# Altium PCB main_board.PcbDoc (part 3 of 3)
Units mm, origin at the board's own origin, x right, y up, seen from the top; angles counter-clockwise.
Board outline 156 x 135 mm, 4 copper layers (Top Side, Ground Plane, Power Plane, Bottom Side), stack 1.602 mm thick; 329 components, 291 nets, 1334 pads, 943 vias.
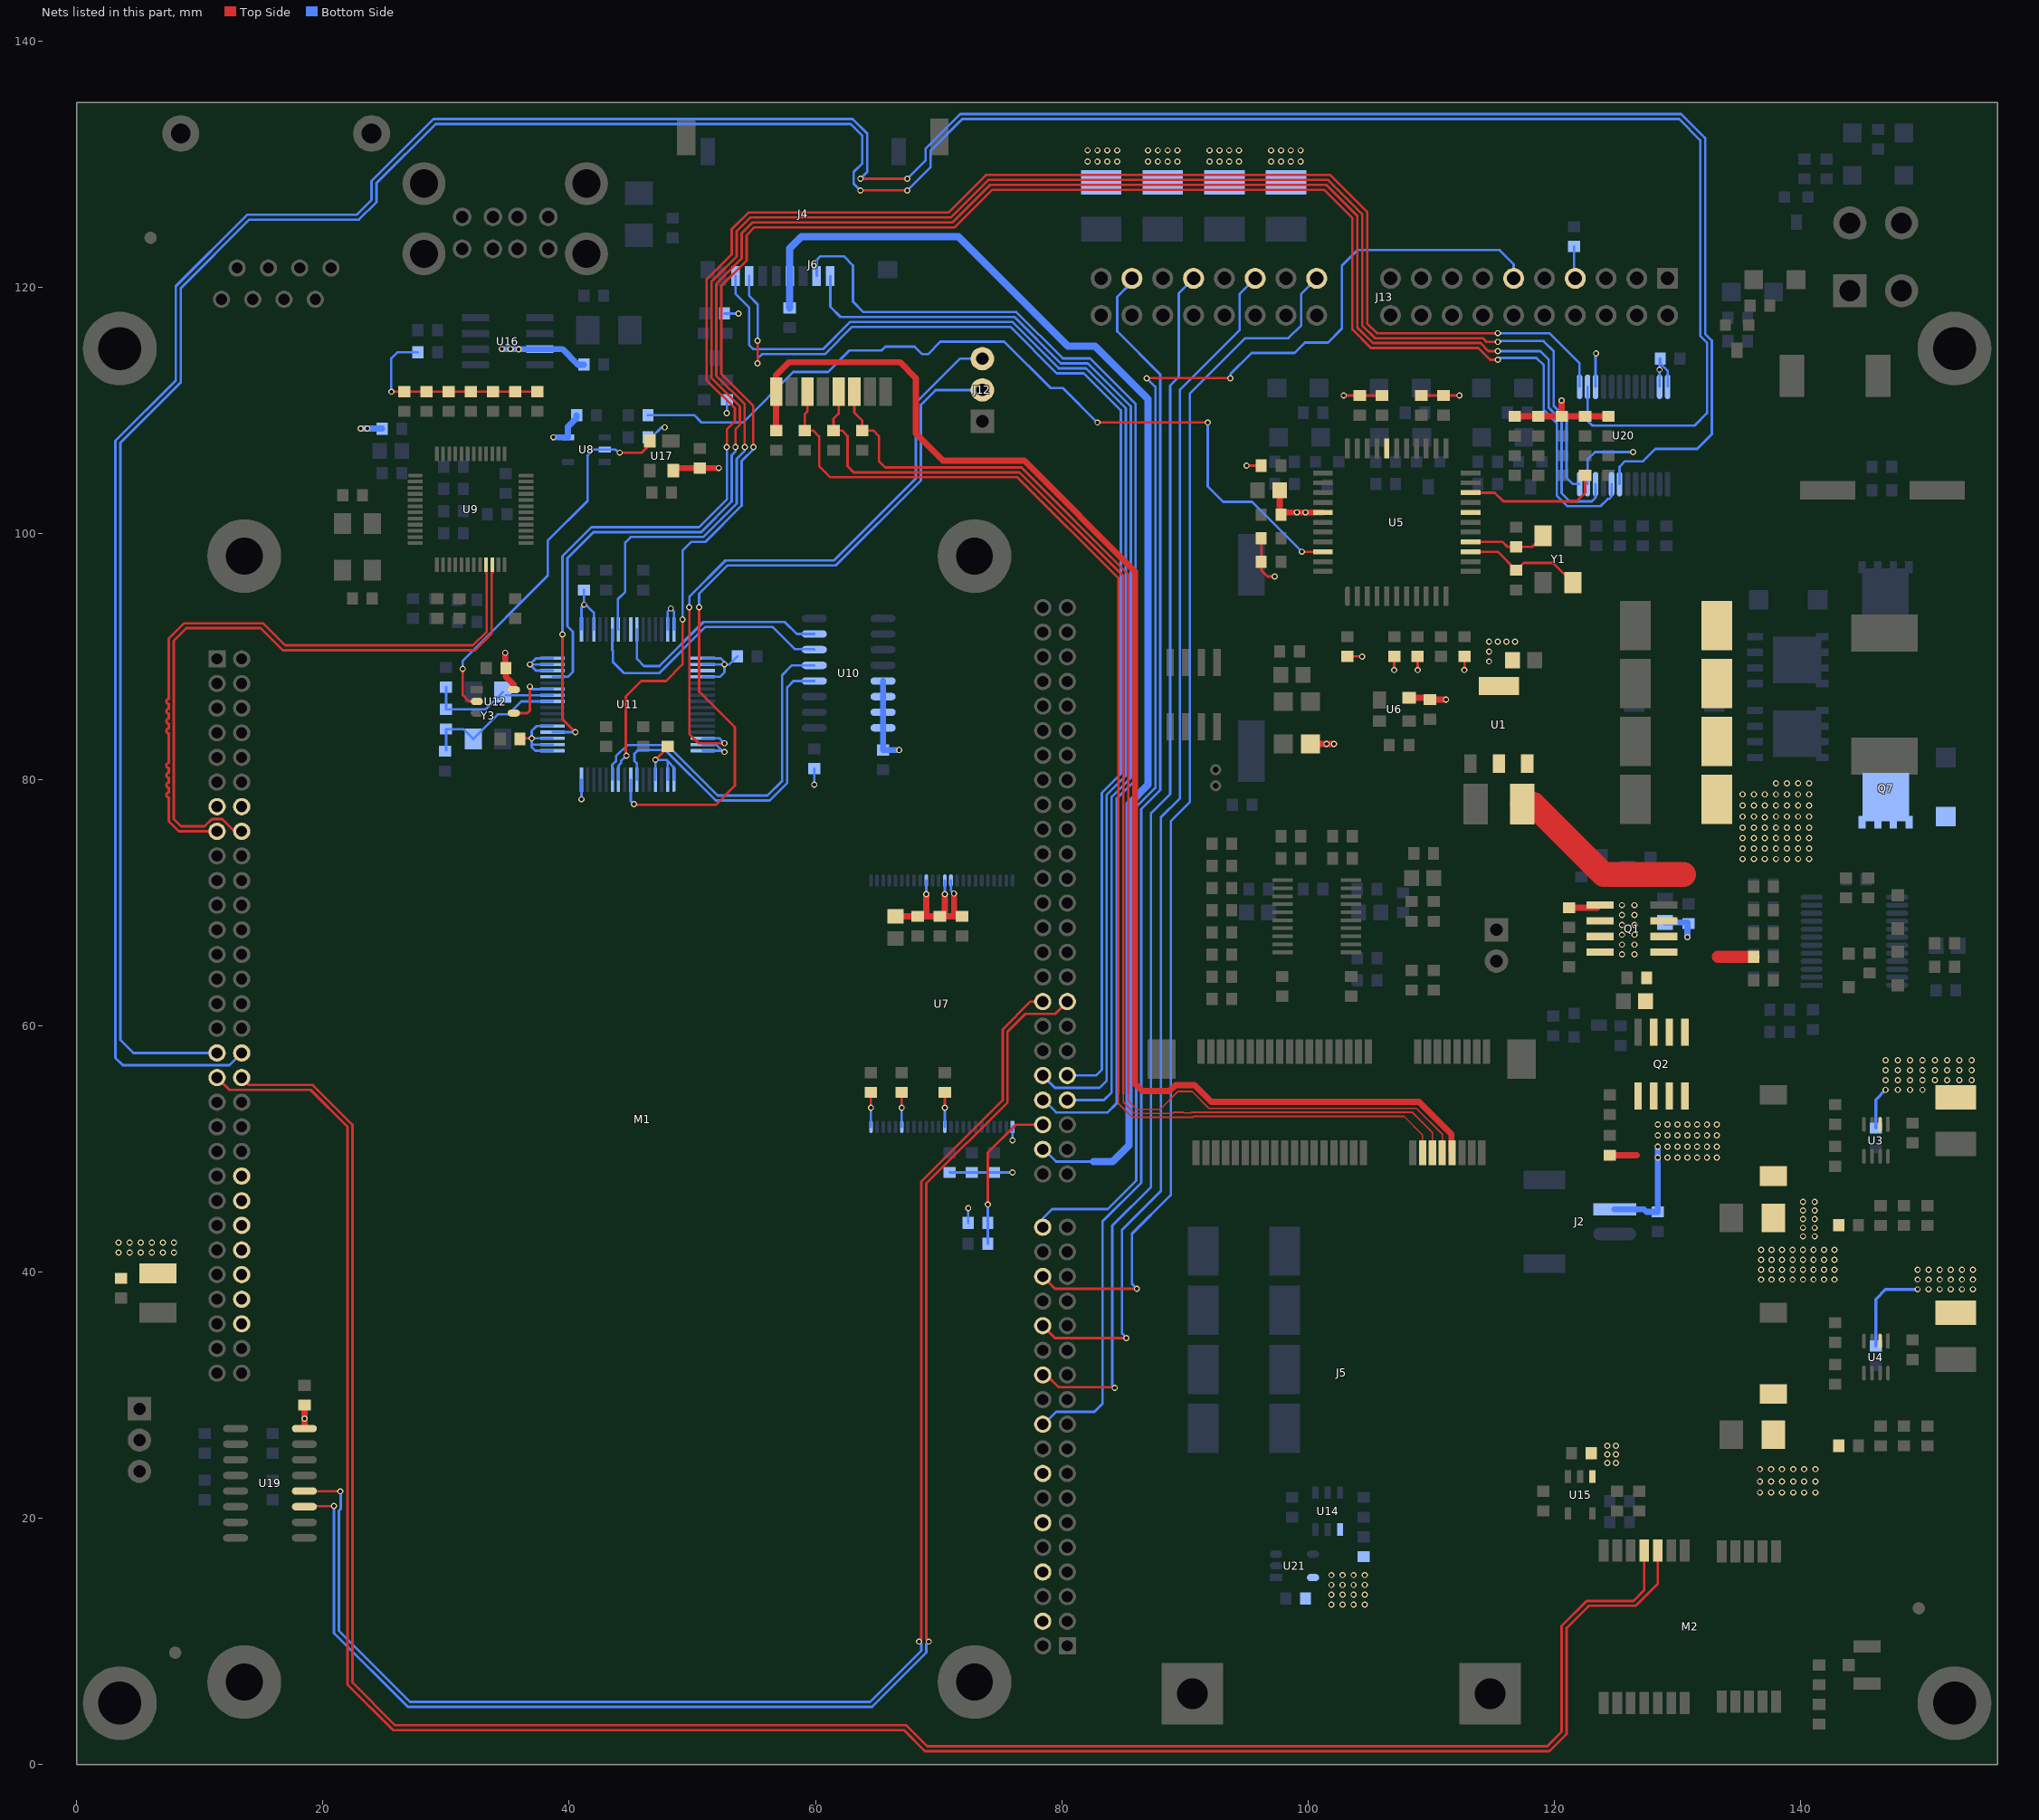
[diagram p5: the nets of this part, all layers, seen from the top]

## Via types
v1: diameter 0.5, hole 0.3, Top Side to Bottom Side, tented both sides, 937 vias
v2: diameter 0.7, hole 0.4, Top Side to Bottom Side, tented both sides, 4 vias
v3: diameter 0.8, hole 0.5, Top Side to Bottom Side, tented both sides, 1 vias
v4: diameter 0.5, hole 0.3, Top Side to Bottom Side, 1 vias

## Nets (pads, with @x,y where several pads share a name; then routed paths per layer and width w, separated by ;. In a path a pad name is that pad's centre, name@x,y a point inside that pad or via, vN(x,y) a via of type N, cw(c..) or ccw(c..) an arc to the next point about the centre after c; other vN are vias at no path point) (continued)
SD-DATA0: J4.7 M1.B9 | length 98.3
  Top Side w0.2: v1(55.3,113.8) v1(55.3,115.65)
  Bottom Side w0.2: J4.7@54.6,120.9 54.6,119.3 55.3,118.6 v1(55.3,115.65) ; v1(55.3,113.8) 55.3,114.2 55.65,114.55 60.766,114.55 62.984,116.768 75.821,116.768 79.589,113 81.789,113 84.8,109.989 84.8,80.485 83.25,78.935 83.25,56.45 82.772,55.972 M1.B9@80.452,55.972
SD-DATA1: J4.8 M1.B10 | length 101.7
  Bottom Side w0.2: J4.8@53.5,120.9 53.5,119.45 54.6,118.35 54.6,115.3 54.95,114.95 60.6,114.95 62.818,117.168 75.987,117.168 79.754,113.4 81.954,113.4 85.2,110.154 85.2,80.32 83.65,78.77 83.65,55.55 83.072,54.972 79.496,54.972 79.474,54.95 M1.B10@78.452,55.972
SD-DATA2: J4.1 M1.B7 | length 90.5
  Bottom Side w0.2: J4.1@61.2,120.9 61.2,118.4 62.032,117.568 76.152,117.568 79.92,113.8 82.12,113.8 85.6,110.32 85.6,80.154 84.05,78.604 84.05,54.6 83.422,53.972 M1.B7@80.452,53.972
SD-DATA3: J4.2 M1.B8 | length 98.2
  Bottom Side w0.2: J4.2@60.1,120.9 60.1,122.2 60.4,122.5 62.3,122.5 63.05,121.75 63.05,118.818 63.9,117.968 76.318,117.968 80.086,114.2 82.286,114.2 86,110.486 86,79.988 84.45,78.438 84.45,53.7 83.722,52.972 79.528,52.972 78.528,53.972 M1.B8@78.452,53.972
SD-LED: D15.2 U5.20 | length 11.3
  Top Side w0.2: U5.20@113.2,103.3 115.169,103.3 115.869,102.6 121.8,102.6 122.5,103.3 D15.2@122.5,104.7
SD-WP: M1.B6 R62.2 R66.2 | length 12.8
  Top Side w0.2: v1(74,45.5) 74,49.706 76.266,51.972 M1.B6@78.452,51.972
  Bottom Side w0.2: R66.2@74,42.3 R62.2@74,44 v1(74,45.5)
SIMCLK: C80.1 J5.12 J6.3 | length 103.8
  Top Side w0.127: 85,54.5 85,53.8 85.9,52.9 89,52.9 89.077,52.977 89.873,52.977 89.93,52.92 90.47,52.92 90.527,52.977 108.473,52.977 110.1,51.35 J5.12@110.1,49.7
  Top Side w0.2: J6.3@61.88,111.5 61.88,109.73 61.467,109.317 C80.1@61.467,108.35 62.15,108.35 62.6,107.9 62.6,105.45 63.1,104.95 76.566,104.95 85,96.516 85,54.5
SIMDATA: C77.1 J5.10 J6.6 | length 103.1
  Top Side w0.127: 85.4,54.5 85.412,54.488 85.412,53.9 86.085,53.227 88,53.227 89.453,54.68 90.565,54.68 91.941,53.304 108.796,53.304 110.9,51.2 J5.10@110.9,49.7
  Top Side w0.2: J6.6@63.15,111.5 63.15,109.8 63.8,109.15 C77.1@63.8,108.35 64.7,108.35 65.15,107.9 65.15,105.85 65.65,105.35 76.731,105.35 85.4,96.681 85.4,54.5
SIMRST: C81.1 J5.14 J6.2 | length 105
  Top Side w0.127: 84.6,54.5 84.6,53.7 85.727,52.573 90.643,52.573 90.72,52.65 107.8,52.65 109.3,51.15 J5.14@109.3,49.7
  Top Side w0.2: J6.2@59.34,111.5 59.34,109.89 59.133,109.683 C81.1@59.133,108.35 59.8,108.35 60.3,107.85 60.3,105.45 61.2,104.55 76.4,104.55 84.6,96.35 84.6,54.5
SIMVCC: C82.1 J5.8 J6.1 | length 114.7
  Top Side w0.5: C82.1@56.8,108.35 J6.1@56.8,111.5 56.8,112.85 57.85,113.9 66.85,113.9 68.15,112.6 68.15,108.1 70.35,105.9 76.959,105.9 85.95,96.909 85.95,55.3 86.55,54.7 88.747,54.7 89.241,55.194 90.777,55.194 92.154,53.817 109.009,53.817 111.65,51.176 111.65,49.75 J5.8@111.7,49.7
SYS-RESET: U8.2 U12.2 U17.2 | length 31
  Top Side w0.2: v1(31.35,89) 31.35,86.85 31.85,86.35 U12.2@32.5,86.35 ; v1(44.1,106.55) 45.9,106.55 46.55,107.2 U17.2@46.55,107.5
  Bottom Side w0.2: v1(31.35,89) 31.35,89.65 38.25,96.55 38.25,99.4 41.5,102.65 41.5,106.35 41.95,106.8 U8.2@42.9,106.8 43.75,106.8 44,106.55 v1(44.1,106.55)
UART0-RXD: M1.B16 U19.12 | length 123.3
  Top Side w0.2: U19.12@18.488,22.22 18.508,22.2 v1(21.4,22.2) ; v1(68.4,10) 68.6,10.2 68.6,47.366 75.2,53.966 75.2,59.71 77.462,61.972 M1.B16@78.452,61.972
  Bottom Side w0.2: v1(21.4,22.2) 21.45,22.15 21.45,20.772 21.3,20.622 21.3,10.866 27.066,5.1 64.434,5.1 68.6,9.266 68.6,9.8 v1(68.4,10)
UART0-TXD: M1.B15 U19.11 | length 124.3
  Top Side w0.2: U19.11@18.488,20.95 18.538,21 v1(20.9,21) ; v1(69.2,10) 69,10.2 69,47.2 75.6,53.8 75.6,59.544 77.028,60.972 79.452,60.972 M1.B15@80.452,61.972
  Bottom Side w0.2: v1(20.9,21) 20.9,10.7 26.9,4.7 64.6,4.7 69,9.1 69,9.8 v1(69.2,10)
UART2-RXD: M1.A35 M2.20 | length 179.6
  Top Side w0.2: M1.A35@11.4,55.8 12.4,54.8 19,54.8 22,51.8 22,6.5 25.7,2.8 67.2,2.8 68.9,1.1 119.6,1.1 121,2.5 121,11.1 122.8,12.9 126.6,12.9 128.4,14.7 M2.20@128.4,17.4
UART2-TXD: M1.A36 M2.21 | length 176.4
  Top Side w0.2: M1.A36@13.4,55.8 14,55.2 19.166,55.2 22.4,51.966 22.4,6.666 25.866,3.2 67.366,3.2 69.066,1.5 119.434,1.5 120.6,2.666 120.6,11.266 122.634,13.3 126.434,13.3 127.3,14.166 M2.21@127.3,17.4
UART3-RXD: M1.A33 U20.14 | length 246.1
  Top Side w0.2: v1(63.65,127.85) v1(67.45,127.85)
  Bottom Side w0.2: M1.A33@11.4,57.8 4.6,57.8 3.55,58.85 3.55,107.353 8.45,112.253 8.45,119.903 14.025,125.478 22.923,125.478 24.342,126.897 24.342,128.445 29.147,133.25 62.853,133.25 63.8,132.303 63.8,130.05 63.1,129.35 63.1,128.4 v1(63.65,127.85) ; v1(67.45,127.85) 69.35,129.75 69.35,131.084 71.916,133.65 130.134,133.65 131.85,131.934 131.85,116.034 132.4,115.484 132.4,109.75 131.4,108.75 123.1,108.75 122.7,109.15 U20.14@122.7,111.9
UART3-TXD: M1.A34 U20.7 | length 249.1
  Top Side w0.2: v1(63.65,128.8) v1(67.45,128.8)
  Bottom Side w0.2: M1.A34@13.4,57.8 12.4,56.8 3.75,56.8 3.15,57.4 3.15,107.519 8.05,112.419 8.05,120.069 13.859,125.878 22.758,125.878 23.942,127.062 23.942,128.611 28.981,133.65 63.019,133.65 64.2,132.469 64.2,129.35 v1(63.65,128.8) ; v1(67.45,128.8) 68.95,130.3 68.95,131.25 71.75,134.05 130.3,134.05 132.25,132.1 132.25,116.2 132.8,115.65 132.8,108.05 131.6,106.85 128.2,106.85 127.2,105.85 125.75,105.85 125.3,105.4 U20.7@125.3,104
UART4-RXD: J12.3 U11.62 | length 51.6
  Top Side w0.2: v1(49.75,94) 49.75,83.7 50.5,82.95 v1(52.6,82.95)
  Bottom Side w0.2: v1(49.75,94) 49.75,94.85 52.7,97.8 61.5,97.8 68.15,104.45 68.15,110.6 71.73,114.18 J12.3@73.55,114.18 ; U11.62@50.85,83.35 52.2,83.35 v1(52.6,82.95)
UART4-TXD: J12.2 U11.8 | length 61.2
  Top Side w0.2: v1(45.25,78) 45.3,77.95 51.9,77.95 53.45,79.5 53.45,84.25 50.55,87.15 v1(50.55,94)
  Bottom Side w0.2: U11.8@45,80 45,78.25 v1(45.25,78) ; v1(50.55,94) 50.55,95.084 52.866,97.4 61.666,97.4 68.55,104.284 68.55,110.434 69.756,111.64 J12.2@73.55,111.64
UART5-RXD: U11.20 U20.13 | length 140.1
  Top Side w0.2: v1(39.45,91.8) 39.45,84.9 v1(40.5,83.85) ; v1(52.8,107) 52.8,108.45 53.45,109.1 53.45,110.15 51.15,112.45 51.15,120.6 53.2,122.65 53.2,124.7 54.55,126.05 70.8,126.05 73.85,129.1 101.8,129.1 104.8,126.1 104.8,117.05 105.6,116.25 v1(115.4,116.25)
  Bottom Side w0.2: U11.20@38.65,83.85 v1(40.5,83.85) ; v1(39.45,91.8) 39.45,98.15 41.8,100.5 50.55,100.5 52.8,102.75 v1(52.8,107) ; v1(115.4,116.25) 119.6,116.25 122.05,113.8 U20.13@122.05,111.9
UART5-TXD: U11.10 U20.8 | length 147.3
  Top Side w0.2: v1(44.65,81.95) 44.6,82 44.6,86.75 45.85,88 47.85,88 49.2,89.35 v1(49.2,93) ; v1(54.95,107) 54.95,110.347 52.35,112.947 52.35,120.103 54.4,122.153 54.4,124.203 55.047,124.85 71.297,124.85 74.347,127.9 101.303,127.9 103.6,125.603 103.6,116.553 105.103,115.05 113.834,115.05 114.785,114.1 v1(115.4,114.1)
  Bottom Side w0.2: U11.10@44,80 44,81.134 44.2,81.334 44.2,81.5 v1(44.65,81.95) ; v1(49.2,93) 49.2,98.6 49.9,99.3 51.047,99.3 54,102.253 54,105.884 54.95,106.834 v1(54.95,107) ; v1(115.4,114.1) 115.55,114.25 118.55,114.25 119.15,113.65 119.15,110.019 120.2,108.969 120.2,103.084 121.084,102.2 123.734,102.2 124.326,102.792 124.442,102.792 124.65,103 U20.8@124.65,104
UART6-RXD: U11.29 U20.12 | length 141.7
  Top Side w0.2: v1(53.5,107) 53.5,108.45 53.85,108.8 53.85,110.316 51.55,112.616 51.55,120.434 53.6,122.484 53.6,124.534 54.716,125.65 70.966,125.65 74.016,128.7 101.634,128.7 104.4,125.934 104.4,116.884 105.434,115.85 114.2,115.85 114.5,115.55 v1(115.4,115.55)
  Bottom Side w0.2: U11.29@38.65,88.35 39.9,88.35 40.3,88.75 40.3,92 39.85,92.45 39.85,97.984 41.966,100.1 50.716,100.1 53.2,102.584 53.2,106.35 53.5,106.65 v1(53.5,107) ; v1(115.4,115.55) 115.4,115.584 115.433,115.617 119.133,115.617 119.95,114.8 119.95,110.35 121,109.3 121,104.5 121.5,104 U20.12@122.05,104
UART6-TXD: U11.39 U20.10 | length 135.6
  Top Side w0.2: v1(54.25,107) 54.25,110.481 51.95,112.781 51.95,120.269 54,122.319 54,124.369 54.881,125.25 71.131,125.25 74.181,128.3 101.469,128.3 104,125.769 104,116.719 105.269,115.45 114,115.45 114.65,114.8 v1(115.4,114.8)
  Bottom Side w0.2: U11.39@44,92.2 43.95,92.25 43.95,94.65 44.55,95.25 44.55,99.25 45,99.7 50.881,99.7 53.6,102.419 53.6,106.05 54.25,106.7 v1(54.25,107) ; v1(115.4,114.8) 118.85,114.8 119.55,114.1 119.55,110.184 120.6,109.134 120.6,103.25 121.25,102.6 123.05,102.6 123.35,102.9 U20.10@123.35,104
UART7-RXD: U11.51
UART7-TXD: U11.41
UART-RST: U11.27 U12.4 | length 5.3
  Top Side w0.2: U12.4@35.5,85.4 36.6,85.4 36.8,85.6 v1(36.8,87.55)
  Bottom Side w0.2: v1(36.8,87.55) 37,87.35 U11.27@38.65,87.35
UARTA-CS: U10.4 U11.7 | length 27.2
  Bottom Side w0.2: U11.7@45.5,80 45.5,81.3 45.3,81.5 45.3,82.1 45.6,82.4 47.8,82.4 51.9,78.3 56.266,78.3 57.7,79.734 57.7,87.5 58.21,88.01 U10.4@59.9,88.01
UARTB-CS: U10.5 U11.11 | length 29.6
  Bottom Side w0.2: U11.11@43.5,80 43.5,81.2 43.8,81.5 43.8,81.9 44.7,82.8 47.966,82.8 52.066,78.7 56.1,78.7 57.3,79.9 57.3,88.5 58.08,89.28 U10.5@59.9,89.28
UARTC-CS: U10.6 U11.38 | length 21.7
  Bottom Side w0.2: U11.38@43.5,92.2 43.5,90.5 43.55,90.45 43.55,89.55 44.45,88.65 47.316,88.65 51.066,92.4 56.5,92.4 58.3,90.6 59.85,90.6 U10.6@59.9,90.55
UARTD-CS: U10.7 U11.42 | length 18.9
  Bottom Side w0.2: U11.42@45.5,92.2 45.5,89.8 46.075,89.225 47.325,89.225 50.9,92.8 57.5,92.8 58.48,91.82 U10.7@59.9,91.82
USB0_N: M1.A15 U9.21 | length 53.9
  Top Side w0.2: M1.A15@11.4,75.8 8.3,75.8 7.483,76.617 7.483,78.55 cw(c7.483,78.75) 7.483,78.95 7.483,79.35 cw(c7.483,79.55) 7.483,79.75 7.483,80.15 cw(c7.483,80.35) 7.483,80.55 7.483,80.95 cw(c7.483,81.15) 7.483,81.35 7.483,81.75 7.483,82.15 7.483,82.2 7.483,83.75 cw(c7.483,83.95) 7.483,84.15 7.483,84.55 cw(c7.483,84.75) 7.483,84.95 7.483,85.35 cw(c7.483,85.55) 7.483,85.75 7.483,86.15 cw(c7.483,86.35) 7.483,86.55 7.483,86.95 7.483,87.35 7.483,87.75 7.483,88.15 7.483,88.55 7.483,88.95 7.483,89.05 7.483,91.449 8.734,92.7 15.116,92.7 16.916,90.9 32.184,90.9 33.3,92.016 33.3,96.7 33.25,96.75 U9.21@33.25,97.45
USB0_P: M1.A16 U9.22 | length 54.1
  Top Side w0.2: M1.A16@13.4,75.8 12.814,75.8 11.814,76.8 10.986,76.8 10.386,76.2 8.466,76.2 7.883,76.783 7.883,91.283 8.9,92.3 14.95,92.3 16.75,90.5 32.35,90.5 33.7,91.85 33.7,96.7 33.75,96.75 U9.22@33.75,97.45
USB1_N: M1.A13
USB1_P: M1.A14
USBHUB-RST: R78.1 U5.42 | length 68.4
  Top Side w0.2: v1(82.9,109) v1(91.85,109) ; v1(99.5,98.5) U5.42@101.2,98.5
  Bottom Side w0.2: R78.1@46.4,109.6 50.15,109.6 50.75,109 54.1,109 58.2,113.1 61.013,113.1 62.763,114.85 65.359,114.85 65.677,115.168 68.054,115.168 68.672,114.55 69.128,114.55 70.146,115.568 75.324,115.568 79.092,111.8 80.1,111.8 v1(82.9,109) ; v1(91.85,109) 91.85,103.8 93.1,102.55 95.45,102.55 v1(99.5,98.5)
V3.3: C19.1 C35.1 C44.2 C45.2 C46.2 C47.2 C48.2 C49.2 C50.2 C66.1 C67.1 C68.2 C69.2 C70.2 C71.2 C72.1 C101.2 C109.1 C114.1 D19.2 L1.2 L4.2 R7.1 R20.1 R59.2 R60.2 R61.2 R62.1 R71.1 R72.1 R73.1 R75.2 R76.2 R77.1 R79.2 R80.2 R81.2 R82.2 R83.2 R113.2 U7.1 U7.12 U7.19 U7.24 U7.34 U7.37 U7.38 U8.5 U10.13 U10.14 U10.15 U10.16 U11.1 U11.2 U11.4 U11.16 U11.17 U11.18 U11.19 U11.21 U11.30 U11.31 U11.32 U11.33 U11.35 U11.47 U11.48 U11.49 U11.50 U11.52 U11.63 U11.64 U12.5 U14.4 U17.4 U19.16 U20.11 U20.15 U20.23 U20.24 U21.5 | length 132.6
  Top Side w0.2: v1(25.55,111.5) R82.2@28.4,111.5 R81.2@30.2,111.5 R80.2@32,111.5 R76.2@33.8,111.5 R79.2@35.6,111.5 R75.2@37.4,111.5 ; C69.2@36.05,83.35 v1(36.95,83.35) ; v1(47,81.6) 48,82.6 C68.2@48,82.7 ; v1(64.5,53.35) C48.2@64.5,54.6 ; v1(67,53.35) C50.2@67,54.6 ; v1(70.5,53.35) C49.2@70.5,54.6
  Top Side w0.5: U19.16@18.5,27.312 C109.1@18.5,29.2 ; v1(34.8,90.3) 34.8,89.1 C72.1@34.85,89.05 34.85,88.35 35.5,87.7 U12.5@35.5,87.3 ; U17.4@48.65,105.3 C101.2@50.6,105.3 v1(52.15,105.3) ; C44.2@66.5,68.9 71.25,68.9 ; 69,68.95 v1(69,70.7) ; C47.2@70.5,69.05 v1(70.5,70.7) ; v1(71.25,70.75) 71.25,68.9 ; C45.2@71.9,68.9 71.25,68.9 ; D19.2@100.2,82.9 v1(102.1,82.9)
  Bottom Side w0.2: v1(25.55,111.5) 25.55,114.2 26.05,114.7 R113.2@27.7,114.7 ; v1(36.95,83.35) U11.19@38.65,83.35 ; U11.17@38.65,82.35 37.25,82.35 36.95,82.65 36.95,82.85 ; U11.18@38.65,82.85 36.95,82.85 ; U11.21@38.65,84.35 37.35,84.35 36.95,83.95 36.95,82.85 ; U11.30@38.65,88.85 37.3,88.85 v1(36.8,89.35) ; U11.31@38.65,89.35 v1(36.8,89.35) ; U11.32@38.65,89.85 37.3,89.85 v1(36.8,89.35) ; v1(41,78.4) U11.16@41,80 ; U11.33@41,92.2 41,94 v1(41.2,94.2) ; C70.2@41.2,95.4 v1(41.2,94.2) ; U11.35@42,92.2 42,93.55 41.4,94.15 41.25,94.15 v1(41.2,94.2) ; R77.1@46.4,107.8 46.7,107.8 47.5,108.6 v1(47.75,108.6) ; U11.4@47,80 v1(47,81.6) 47.9,81.6 48,81.5 ; U11.2@48,80 48,81.5 ; U11.47@48,92.2 48,93.65 v1(48.25,93.9) 48.5,93.65 U11.48@48.5,92.2 ; U11.1@48.5,80 48.5,81 48,81.5 ; U11.64@50.85,82.35 v1@52.422,82.35 ; U11.63@50.85,82.85 51.922,82.85 v1@52.422,82.35 ; U11.52@50.85,88.35 52.25,88.35 52.6,88.7 v1(52.6,89.35) ; U11.50@50.85,89.35 v1(52.6,89.35) ; U11.49@50.85,89.85 52.3,89.85 v1@52.6,89.55 ; v1(52.6,82.25) 52.5,82.35 v1@52.422,82.35 ; R72.1@52.6,117.85 v1(53.75,117.85) ; R71.1@52.8,110.85 v1(52.8,109.75) v1@52.85,109.7 ; C71.2@53.65,90 53,89.35 v1(52.6,89.35) ; v1(59.9,79.6) R83.2@59.9,80.9 ; U7.24@64.5,51.8 v1(64.5,53.35) ; U7.19@67,51.8 v1(67,53.35) ; v1(69,70.7) U7.34@69,71.8 ; U7.12@70.5,51.8 v1(70.5,53.35) ; v1(70.5,70.7) U7.37@70.5,71.8 ; R59.2@70.9,48.1 R60.2@72.7,48.1 R61.2@74.5,48.1 v1(76,48.1) ; U7.38@71,71.8 71,71 v1(71.25,70.75) ; R62.1@72.4,44 v1(72.4,45.2) ; v1(76,50.7) U7.1@76,51.8 ; U20.11@122.7,104 122.7,106 123.3,106.6 v1(126.4,106.6) ; U20.15@123.35,111.9 123.35,114.55 v1(123.4,114.6) ; U20.23@128.55,111.9 C114.1@128.55,114.15 ; C114.1@128.6,114.2 128.6,113.8 129.2,113.2 U20.24@129.2,111.9
  Bottom Side w0.5: v1(23.05,108.5) v1(23.6,108.5) L4.2@24.8,108.5 ; v1(38.7,107.8) U8.5@39.9,107.8 39.9,108.65 40.6,109.35 C66.1@40.6,109.6 ; C67.1@65.488,82.412 U10.16@65.488,84.2 U10.15@65.488,85.47 U10.14@65.488,86.74 U10.13@65.488,88.01 ; C67.1@65.5,82.4 v1(66.8,82.4)
  other v1: 101.9,13 102.8,13 103.7,13 104.6,13 101.9,13.8 102.8,13.8 103.7,13.8 104.6,13.8 101.9,14.6 102.8,14.6 103.7,14.6 104.6,14.6 101.9,15.4 102.8,15.4 103.7,15.4 104.6,15.4 18.5,28.1 136.8,39.4 137.65,39.4 138.5,39.4 139.35,39.4 140.2,39.4 141.05,39.4 141.9,39.4 142.75,39.4 136.8,40.2 137.65,40.2 138.5,40.2 139.35,40.2 140.2,40.2 141.05,40.2 141.9,40.2 142.75,40.2 136.8,41 137.65,41 138.5,41 139.35,41 140.2,41 141.05,41 141.9,41 142.75,41 136.8,41.8 137.65,41.8 138.5,41.8 139.35,41.8 140.2,41.8 141.05,41.8 141.9,41.8 142.75,41.8 140.2,42.9 141.15,42.9 140.2,43.6 141.15,43.6 140.2,44.3 141.15,44.3 140.2,45 141.15,45 140.2,45.7 141.15,45.7 101.5,82.9 128.55,113.3
V3.3-MCU: C4.2 C36.2 C37.2 C38.2 R40.1 R41.1 R42.1 R43.1 R44.1 R45.1 R46.1 R47.1 R48.1 R49.1 R50.1 R51.1 R54.1 R55.1 R56.1 R58.2 U1.2 U1.4 U5.38 U6.4 | length 32.6
  Top Side w0.2: v1(95,105.5) R51.1@96.2,105.5 ; R54.1@96.2,99.6 R55.1@96.2,97.7 96.2,97 96.7,96.5 v1(97.3,96.5) ; v1(102.9,111.2) R48.1@104.2,111.2 R50.1@106,111.2 ; R56.1@103.2,90 v1(104.4,90) ; v1(107,88.9) R58.2@107,90 ; v1(108.9,88.9) R46.1@108.9,90 ; R45.1@109.2,111.2 R49.1@111,111.2 v1(112.3,111.2) ; v1(112.7,88.9) R47.1@112.7,90
  Top Side w0.5: C36.2@97.7,101.7 C37.2@97.7,103.5 ; C36.2@98,101.7 U5.38@101.2,101.7 ; U6.4@108.2,86.65 C38.2@109.75,86.65 ; C38.2@109.9,86.5 v1(111.2,86.5) ; R44.1@116.8,109.5 R43.1@118.7,109.5 R42.1@120.6,109.5 ; v1(120.6,110.8) R42.1@120.6,109.5 ; R40.1@124.4,109.5 R41.1@122.5,109.5 R42.1@120.6,109.5
  other v1: 114.7,89.6 114.7,90.4 114.7,91.2 115.4,91.2 116.1,91.2 116.8,91.2 99.1,101.7 99.8,101.7
V3.3-SD: C51.2 J4.4 M1.B4 | length 109
  Bottom Side w0.2: M1.B4@78.452,49.972 78.528,49.972 79.528,48.972 82.578,48.972
  Bottom Side w0.6: C51.2@57.9,118.3 J4.4@57.9,120.9 57.9,123.15 58.85,124.1 71.6,124.1 80.5,115.2 82.7,115.2 87,110.9 87,79.574 85.45,78.024 85.45,50.3 84.122,48.972 82.578,48.972
V5: C29.1 C42.2 C43.2 C98.1 C102.1 L3.2 M1.A44 M1.A46 M1.A48 M1.A50 M1.A52 M1.A54 M1.A56 R38.1 U15.1 U16.7 | length 7.2
  Bottom Side w0.5: v1(34.535,114.965) v1(35.215,114.965) 39.435,114.965 40.7,113.7 C102.1@41.2,113.7
  other v1: 136.7,22.1 137.6,22.1 138.5,22.1 139.4,22.1 140.3,22.1 141.2,22.1 136.7,23 137.6,23 138.5,23 139.4,23 140.3,23 141.2,23 136.7,24 137.6,24 138.5,24 139.4,24 140.3,24 141.2,24 124.3,24.5 125,24.5 124.3,25.2 125,25.2 124.3,25.9 125,25.9 3.4,41.6 4.3,41.6 5.2,41.6 6.1,41.6 7,41.6 7.9,41.6 3.4,42.4 4.3,42.4 5.2,42.4 6.1,42.4 7,42.4 7.9,42.4 35.9,114.95
V12: C18.2 C28.2 C88.2 J2.2 Q2.5 Q2.6 Q2.7 Q2.8 R4.2 R18.2 R36.2 U3.2 U4.2 | length 22
  Top Side w0.5: R4.2@124.5,49.5 126.7,49.5
  Bottom Side w0.254: R36.2@146.1,34 146.1,37.8 146.9,38.6 v1(149.5,38.6) ; R18.2@146.1,51.7 146.1,54 v1(146.9,54.8)
  Bottom Side w0.5: J2.2@124.9,45.1 127.3,45.1 127.5,44.9 C88.2@128.4,44.9 v1(128.4,49.3) v1(128.4,50.2)
  other v1: 150.4,38.6 151.3,38.6 152.2,38.6 153.1,38.6 154,38.6 149.5,39.4 150.4,39.4 151.3,39.4 152.2,39.4 153.1,39.4 154,39.4 149.5,40.2 150.4,40.2 151.3,40.2 152.2,40.2 153.1,40.2 154,40.2 129.2,49.3 130,49.3 130.8,49.3 131.6,49.3 132.4,49.3 133.2,49.3 129.2,50.2 130,50.2 130.8,50.2 131.6,50.2 132.4,50.2 133.2,50.2 128.4,51.1 129.2,51.1 130,51.1 130.8,51.1 131.6,51.1 132.4,51.1 133.2,51.1 128.4,52 129.2,52 130,52 130.8,52 131.6,52 132.4,52 133.2,52 147.9,54.8 148.9,54.8 149.9,54.8 146.9,55.6 147.9,55.6 148.9,55.6 149.9,55.6 150.9,55.6 151.9,55.6 152.9,55.6 153.9,55.6 146.9,56.4 147.9,56.4 148.9,56.4 149.9,56.4 150.9,56.4 151.9,56.4 152.9,56.4 153.9,56.4 146.9,57.2 147.9,57.2 148.9,57.2 149.9,57.2 150.9,57.2 151.9,57.2 152.9,57.2 153.9,57.2
V12-CAM: F1.1 F2.1 F3.1 F4.1 Q1.5 Q1.6 Q1.7 Q1.8 R3.2 | length 2.3
  Top Side w0.5: R3.2@121.2,69.6 Q1.5@123.495,69.6
  other v1: 125.5,65.8 126.5,65.8 125.5,66.6 126.5,66.6 125.5,67.4 126.5,67.4 125.5,68.2 126.5,68.2 125.5,69 126.5,69 125.5,69.8 126.5,69.8 82.1,130.2 82.9,130.2 83.7,130.2 84.5,130.2 87,130.2 87.8,130.2 88.6,130.2 89.4,130.2 92,130.2 92.8,130.2 93.6,130.2 94.4,130.2 97,130.2 97.8,130.2 98.6,130.2 99.4,130.2 82.1,131.1 82.9,131.1 83.7,131.1 84.5,131.1 87,131.1 87.8,131.1 88.6,131.1 89.4,131.1 92,131.1 92.8,131.1 93.6,131.1 94.4,131.1 97,131.1 97.8,131.1 98.6,131.1 99.4,131.1
V12-MP: C1.2 C2.2 C3.2 C10.1 C11.1 C12.1 C13.1 D10.2 Q1.1 Q1.2 Q1.3 Q2.1 Q2.2 Q2.3 Q7. Q7.5 Q7.6 Q7.7 Q7.8 R1.2 R2.2 R26.1 U1.3 | length 21.4
  Top Side w1: 133.3,65.6 R26.1@136.2,65.6
  Top Side w2: C3.2@117.4,78 118.3,78 124,72.3 130.5,72.3
  Bottom Side w0.5: C1.2@129,68.4 130.8,68.4 v1(130.8,67.2)
  other v1: 135.3,73.55 136.2,73.55 137.1,73.55 138,73.55 138.9,73.55 139.8,73.55 140.7,73.55 135.3,74.4 136.2,74.4 137.1,74.4 138,74.4 138.9,74.4 139.8,74.4 140.7,74.4 135.3,75.25 136.2,75.25 137.1,75.25 138,75.25 138.9,75.25 139.8,75.25 140.7,75.25 135.3,76.1 136.2,76.1 137.1,76.1 138,76.1 138.9,76.1 139.8,76.1 140.7,76.1 137.1,76.95 135.3,77 136.2,77 138,77 138.9,77 139.8,77 140.7,77 135.3,77.9 136.2,77.9 137.1,77.9 138,77.9 138.9,77.9 139.8,77.9 140.7,77.9 135.3,78.8 136.2,78.8 137.1,78.8 138,78.8 138.9,78.8 139.8,78.8 140.7,78.8 138,79.7 138.9,79.7 139.8,79.7 140.7,79.7
VIDEO-OUT: J13.11 M1.C36 | length 114.6
  Top Side w0.2: v1(86.9,112.6) v1(93.7,112.6)
  Bottom Side w0.2: M1.C36@78.452,43.649 78.452,44.352 79.213,45.113 83.737,45.113 86.05,47.425 86.05,77.775 87.6,79.325 87.6,111.9 v1(86.9,112.6) ; v1(93.7,112.6) 93.7,112.937 95.413,114.65 98.897,114.65 99.747,115.5 101.616,115.5 102.75,116.634 102.75,121.75 104,123 115.55,123 116.7,121.85 J13.11@116.7,120.7
VIN1: J13.21 M1.C32 | length 98.5
  Top Side w0.2: M1.C32@78.452,39.649 79.452,38.649 v1(86.1,38.65) v1(86.1,38.65)
  Bottom Side w0.2: v1(86.1,38.65) 85.7,39.05 85.7,43.116 88.85,46.266 88.85,76.616 90.4,78.166 90.4,111.334 94.916,115.85 98.4,115.85 99.45,116.9 99.45,119.45 J13.21@100.7,120.7
VIN2: J13.25 M1.C28 | length 97.9
  Top Side w0.2: M1.C28@78.452,35.649 79.452,34.649 85.249,34.649 v1(85.25,34.65)
  Bottom Side w0.2: v1(85.25,34.65) 84.9,35 84.9,43.447 88.05,46.597 88.05,76.947 89.6,78.497 89.6,111.666 94.45,116.516 94.45,119.45 J13.25@95.7,120.7
VIN3: J13.29 M1.C24 | length 99.2
  Top Side w0.2: M1.C24@78.452,31.649 78.751,31.649 79.751,30.649 84.251,30.649 v1(84.3,30.6)
  Bottom Side w0.2: v1(84.3,30.6) 84.1,30.8 84.1,43.778 87.25,46.928 87.25,77.278 88.8,78.828 88.8,111.997 89.5,112.697 89.5,119.5 J13.29@90.7,120.7
VIN4: J13.33 M1.C20 | length 100.8
  Bottom Side w0.2: M1.C20@78.452,27.649 78.549,27.649 79.549,28.649 82.649,28.649 83.3,29.3 83.3,44.11 86.45,47.26 86.45,77.61 88,79.16 88,112.9 84.5,116.4 84.5,119.2 85.7,120.4 J13.33@85.7,120.7
VIN5: M1.C16
VIN6: M1.C12
VIN7: M1.C8
VIN8: M1.C4
VLOSS-LED: U5.29
VOICE-OUT: C93.2 J13.7 | length 2.5
  Bottom Side w0.2: J13.7@121.6,120.8 C93.2@121.6,123.3
WIFI-LED: U5.18
X1: C39.2 U5.15 Y1.2 | length 6.4
  Top Side w0.2: U5.15@113.2,99.3 115.8,99.3 116.2,98.9 C39.2@116.9,98.9 118.2,98.9 Y1.2@119.1,99.8
X2: C41.2 U5.14 Y1.1 | length 9.8
  Top Side w0.2: U5.14@113.2,98.5 115.4,98.5 C41.2@116.9,97 117.5,97.6 119.9,97.6 Y1.1@121.5,96
XT1: C73.2 R88.2 U11.25 Y3.2 | length 11.9
  Bottom Side w0.2: C73.2@30,82.4 R88.2@30,84.1 31.4,84.1 Y3.2@32.2,83.3 34.2,85.3 35.05,85.3 36.1,86.35 U11.25@38.65,86.35
XT2: C74.2 R88.1 U11.26 Y3.1 | length 10.8
  Bottom Side w0.2: C74.2@30,87.5 R88.1@30,85.7 33.2,85.7 Y3.1@34.6,87.1 ; Y3.1@34.85,86.85 U11.26@38.65,86.85
pads on no net: J5.1 J5.3 J5.5 J5.6 J5.7 J5.11 J5.13 J5.16 J5.17 J5.19 J5.20 J5.23 J5.25 J5.28 J5.30 J5.31 J5.32 J5.33 J5.42 J5.44 J5.46 J5.48 J6.@60.61,111.5 J6.@64.42,111.5 J6.@65.69,111.5 J10.4 J10.5 J10.7 J10.8 J13.19 M1.A3 M1.A4 M1.A5 M1.A6 M1.A7 M1.A8 M1.A9 M1.A10 M1.A19 M1.A22 M1.A25 M1.A27 M1.A28 M1.A29 M1.A30 M1.A40 M1.A42 M1.B18 M1.B23 M1.C35 M2.1 M2.2 M2.3 M2.4 M2.5 M2.6 M2.16 M2.17 M2.18 M2.19 MARK1. MARK2. MARK3. MARK4. MARK5. MARK6. U2.1 U5.2 U5.3 U5.5 U5.6 U5.7 U5.17 U5.28 U5.32 U5.33 U5.35 U5.39 U5.43 U5.44 U7.3 U7.4 U7.5 U7.6 U7.10 U7.11 U7.14 U7.15 U7.20 U7.21 U7.22 U7.26 U7.27 U7.28 U7.33 U7.35 U7.39 U7.40 U7.45 U7.46 U7.47 U9.28 U9.29 U10.9 U10.10 U10.11 U10.12 U11.3 U11.5 U11.13 U11.15 U11.34 U11.36 U11.44 U11.46 U12.1 U13.7 U16.2 U16.3 U18.3 U18.7 U19.7 U19.8 U19.9 U19.10 U20.9 U21.1 Y1. Y2. Y3.
copper on no net: | length 2.2
  Bottom Side w0.1: 129.3,80 131.5,80

## Polygon pours and split planes (outlines as drawn)
GND on Bottom Side "Top Layer-No Net" (solid, remove dead copper, pour order 51): 0,0 156,0 156,135 0,135
V12-CAM on Bottom Side "Top Layer-No Net" (solid, remove dead copper, pour order 70): 81.4,126.8 88.4,126.8 101.3,126.8 101.5,126.978 101.5,131.522 101.3,131.7 80.7,131.7 80.5,131.522 80.5,126.978 80.7,126.8
V3.3 on Bottom Side "Top Layer-No Net" (solid, remove dead copper, pour order 66): 102.1,18 102.1,19.9 102.3,20.1 103.3,20.1 103.5,19.9 103.5,18.3 103.5,17.9 103.7,17.7 105.6,17.7 105.8,17.5 105.8,12.4 105.6,12.2 99.2,12.2 99,12.4 99,15.7 99.2,15.9 100.9,15.9 102.1,17.1
CELLULAR-PWR on Bottom Side "Top Layer-No Net" (solid, remove dead copper, pour order 60): 103,29.5 106.2,26.3 106.2,21.3 106.2,21.1 106,20.9 101.3,20.9 101.1,21.1 101.1,22.8 100.5,23.4 100.5,29.5
PWR-IN on Bottom Side "Top Layer-No Net" (solid, remove dead copper, pour order 49): 146.3,102.1 146.3,104.4 146.3,106.2 142.8,109.7 142,110.5 142,111.5 142,115.4 141.8,115.6 139.8,115.6 137.8,115.6 137.6,115.4 137.6,101.4 138.2,100.8
NetD1_2 on Bottom Side "Top Layer-No Net" (solid, remove dead copper, pour order 41): 145.8,110.2 147.2,110.2 147.8,110.2 148,110.4 148,113.4 148,116.4 148,116.7 150,118.7 150,120.9 150,121.5 149.8,121.7 147,121.7 146.5,121.7 146.3,121.5 146.3,120.8 146.3,118.2 145.1,117 144.6,116.5 144.6,114.9 144.6,110.4 144.8,110.2
CELLULAR-PWR on Bottom Side "Bottom Layer-No Net" (solid, remove dead copper, pour order 73): 97.8,23.4 101.6,23.4 102.8,23.4 103,23.6 103,44.6 102.8,44.8 95.9,44.8 95.7,44.6 95.7,23.6 95.9,23.4
NetD12_1 on Bottom Side "Top Layer-No Net" (solid, remove dead copper, pour order 67): 134.7,96.3 138,96.3 138.2,96.1 138.2,93.5 138,93.3 137.3,93.3 135.3,93.3 135.1,93.1 135.1,91.2 135.3,91 137.1,91 137.3,90.8 137.3,87.3 137.1,87.1 135.5,87.1 135.3,86.9 135.3,85.2 135.5,85 137.1,85 137.3,84.8 137.3,80.5 137.1,80.3 131.1,80.3 130.9,80.5 130.9,91.2 133.2,93.5 133.2,95.6 133.2,96.1 133.4,96.3
NetC16_1 on Bottom Side "Top Layer-No Net" (solid, remove dead copper, pour order 61): 138,86.5 145.5,86.5 153,86.5 153.3,86.2 153.3,80.4 153.1,80.2 150.7,80.2 150.5,80.4 150.5,81 149.9,81.6 149.7,81.8 149.7,83 149.5,83.2 148.4,83.2 148.2,83 148.2,81 148,80.8 137.8,80.8 137.6,81 137.6,86.1 137.9,86.4
NetC30_1 on Bottom Side "Top Layer-No Net" (solid, remove dead copper, pour order 56): 140.2,96.3 142.2,96.3 142.5,96 142.5,95.1 142.5,92.4 143,91.9 144.2,90.7 145.5,90.7 145.7,90.9 145.7,92.6 145.9,92.8 150,92.8 150.4,92.4 150.4,92.3 150.4,87.5 150.4,87.1 150.1,86.8 142.8,86.8 140.6,86.8 138,86.8 137.7,87.1 137.6,87.2 137.6,90.4 137.6,91.8 138.3,92.5 139.9,94.1 139.9,96
PWR-IN on Bottom Side "Top Layer-No Net" (solid, remove dead copper, pour order 42): 138.2,102.1 138.2,100.8 140.7,98.3 143.8,95.2 143.8,94.3 143.8,93.4 144.1,93.1 149.3,93.1 150,93.1 150.4,93.5 150.4,98 146.3,102.1
PWR-IN on Bottom Side "Top Layer-No Net" (solid, remove dead copper, pour order 40): 138.2,102.1 138.2,100.8 138.5,100.5 141.5,100.5 141.6,100.5 141.9,100.8 141.9,101.8 141.9,101.9 141.7,102.1
V12-MP on Bottom Side "Bottom Layer-No Net" (solid, remove dead copper, pour order 46): 143.1,80.5 138.3,80.5 137.8,80.5 137.7,80.4 137.6,80.3 137.6,80.1 137.6,75.6 137.9,75.3 140.9,75.3 153.3,75.3 153.6,75.6 153.6,77.8 153.4,78 150.7,78 150.2,78 149.9,78 149.3,78.6 149.3,79.7 149.3,80.3 149.1,80.5
V12-MP on Bottom Side "Top Layer-No Net" (solid, remove dead copper, pour order 75): 137.6,76.15 137.6,73.265 137.6,73.111 137.95,72.75 141.65,72.75 143.95,75.12 144.15,75.326 144.15,76.15
V12-MP on Bottom Side "Top Layer-No Net" (solid, remove dead copper, pour order 76): 137.95,72.75 135.05,72.75 134.7,73.1 134.7,79.45 135.15,79.9 136.9,79.9 137.2,79.9 137.6,80.3 137.8,80.5
OUT2 on Bottom Side "Top Layer-No Net" (solid, remove dead copper, pour order 77): 37.75,124.25 39,124.25 39.25,124 39.25,121.25 40,120.5 41.75,120.5 42,120.25 42,115.1 41.75,114.85 40.4,114.85 40,115.25 39.95,115.3 39.95,116.3 39.95,116.8 39.75,117 39.05,117 36.35,117 36.3,117 36.15,117.15 36.15,117.8 36.15,118.2 36.15,120.3 37.15,121.3 37.15,124.05 37.35,124.25
OUT1 on Bottom Side "Top Layer-No Net" (solid, remove dead copper, pour order 78): 36.55,114.2 39.2,114.2 40.5,112.9 40.6,112.8 40.65,112.8 44.15,112.8 44.95,113.6 45.55,114.2 45.65,114.2 47.05,114.2 47.65,114.8 47.7,114.85 47.7,116.15 47.7,119.45 46.8,120.35 45.85,120.35 45.5,120.35 43.85,122 43.55,122.3 43.55,123.75 42.9,124.4 42.7,124.6 42.6,124.7 42.05,124.7 40.25,124.7 37.35,124.7 37.15,124.9 37.15,126.5 37.35,126.7 39.9,126.7 40.1,126.5 40.15,126.45 40.95,126.45 43.2,126.45 43.8,125.85 44.1,125.55 45,125.55 46.85,125.55 47.55,124.85 47.7,124.7 48.4,124.7 49.3,124.7 49.5,124.5 49.5,114.35 46.45,111.3 39.9,111.3 39.05,112.15 38.05,113.15 37.6,113.15 36.25,113.15 36.1,113.3 36.1,114.05 36.25,114.2
GND on Top Side "Top Layer-No Net" (solid, remove dead copper, pour order 45): 0,0 156,0 156,135 0,135
NetC27_1 on Top Side "Top Layer-No Net" (solid, remove dead copper, pour order 74): 137.8,35.1 136.4,35.1 136.2,35.3 136.2,38.2 136.4,38.4 145.8,38.4 146,38.2 146,33.8 145.9,33.7 145.7,33.7 145.6,33.7 145.5,33.8 145.5,35.2 145.3,35.4 144.1,35.4 143.8,35.1
V3.3 on Top Side "Top Layer-No Net" (solid, pour order 72): 136.2,40.5 136.2,39.359 136.2,38.92 136.4,38.7 143.6,38.7 143.8,38.92 143.8,40.5
V3.3-MCU on Top Side "Top Layer-No Net" (solid, remove dead copper, pour order 54): 113,86.3 113,84.1 113,84 114.5,82.5 114.5,80.5 114.8,80.2 116.1,80.2 116.4,80.5 116.4,82.4 116.4,82.5 116.8,82.9 117.5,83.6 117.5,86.3
V3.3-MCU on Top Side "Top Layer-No Net" (solid, remove dead copper, pour order 50): 114.2,86.1 117,86.1 117.3,86.1 117.5,86.3 117.5,91.6 117.3,91.8 114.9,91.8 114.3,91.8 114.1,91.6 114.1,89.4 113,88.3 113,86.3 113.2,86.1
V12-MP on Top Side "Top Layer-No Net" (solid, remove dead copper, pour order 47): 117.5,82.6 119.3,82.6 120.3,82.6 120.5,82.4 120.5,75.6 120.3,75.4 116,75.4 115.8,75.6 115.8,79.4 116.8,80.4 116.8,81.9 116.8,82.4 117,82.6
V12-MP on Top Side "Top Layer-No Net" (solid, pour order 43): 129.8,75.7 129.8,71.337 130.4,70.728 130.4,69.409 130.1,69.104 130.1,68.8 134.158,68.8 134.2,68.843 134.2,72.554 134.4,72.757 141.3,72.757 141.5,72.96 141.5,75.7
PWR-IN on Top Side "Top Layer-No Net" (solid, remove dead copper, pour order 53): 138.6,115.6 142.1,115.6 142.8,115.6 143,115.4 143,114 143,109.5 145.6,106.9 145.8,106.7 145.8,104.7 145.8,100.4 145.6,100.2 138.7,100.2 137.8,100.2 137.6,100.4 137.6,115.4 137.8,115.6
NetC16_1 on Top Side "Top Layer-No Net" (solid, remove dead copper, pour order 63): 144.6,79.6 149.4,79.6 150.1,79.6 150.4,79.9 150.4,86.2 150.1,86.5 143.9,86.5 143.8,86.4 143.6,86.2 143.6,84.4 143.6,79.9 143.9,79.6
NetC30_1 on Top Side "Top Layer-No Net" (solid, remove dead copper, pour order 58): 144.2,94.3 150.2,94.3 150.4,94.1 150.4,87.1 150.1,86.8 143.9,86.8 143.6,87.1 143.6,94 143.9,94.3
V12-MP on Top Side "Bottom Layer-No Net" (solid, remove dead copper, pour order 44): 132.4,95.5 135.5,95.5 136.1,95.5 136.5,95.1 136.5,91.7 136.5,86.2 137.3,85.4 140.5,82.2 141.4,81.3 141.5,81.2 141.5,78.6 141.5,75.6 141.2,75.3 130.1,75.3 129.8,75.6 129.8,95.2 130.1,95.5
V12-MP on Top Side "Bottom Layer-No Net" (solid, remove dead copper, pour order 48): 128.105,69.2 131.965,69.2 133.895,69.2 134.2,68.842 134.2,57.158 133.895,56.8 128.511,56.8 128.308,56.8 128.105,56.8 127.8,57.158 127.8,68.842 128.105,69.2
V12-CAM on Top Side "Bottom Layer-No Net" (solid, remove dead copper, pour order 55): 122.8,70.9 126.2,70.9 127.2,70.9 127.4,70.7 127.4,65.2 127.2,65 122.5,65 122.3,65.2 122.3,70.7 122.5,70.9
V12 on Top Side "Bottom Layer-No Net" (solid, remove dead copper, pour order 57): 126.57,56.4 133.848,56.4 134.2,56.1 134.2,49.7 134.2,48.7 133.848,48.4 129.152,48.4 126.452,48.4 126.1,48.7 126.1,56.2 126.335,56.4
V12 on Top Side "Bottom Layer-No Net" (solid, remove dead copper, pour order 59): 146.5,51.2 146.6,51.2 146.7,51.3 146.7,53 146.9,53.2 154.8,53.2 155,53.4 155,57.6 154.8,57.8 146.4,57.8 146.2,57.6 146.2,54.2 146.2,51.3 146.3,51.2
NetC15_1 on Top Side "Bottom Layer-No Net" (solid, remove dead copper, pour order 62): 145.803,51.2 145.902,51.2 146,51.3 146,52 146,57.2 146,57.6 145.803,57.8 139.81,57.8 134.897,57.8 134.7,57.6 134.7,53.4 134.897,53.2 145.312,53.2 145.509,53 145.509,52.8 145.509,51.3 145.607,51.2
V3.3 on Top Side "Bottom Layer-No Net" (solid, remove dead copper, pour order 64): 136.5,49.7 139.9,49.7 140.9,49.7 141.3,49.249 141.3,46.316 141.5,46.091 141.7,45.865 141.9,45.865 143.4,45.865 143.8,45.414 143.8,40.338 143.5,40 136.9,40 136.5,40 136.2,40.338 136.2,49.474 136.4,49.7
V12 on Top Side "Bottom Layer-No Net" (solid, remove dead copper, pour order 65): 146.5,33.7 146.6,33.7 146.7,33.8 146.7,35.1 146.7,35.3 147,35.6 154.8,35.6 155,35.8 155,40.5 154.8,40.7 146.4,40.7 146.2,40.5 146.2,33.8 146.3,33.7
V5 on Top Side "Bottom Layer-No Net" (solid, remove dead copper, pour order 68): 137,32.3 140.5,32.3 140.8,32 141.1,31.7 141.1,30.8 141.1,28.3 141.5,27.9 143.2,27.9 143.8,27.3 143.8,27.1 143.8,22 143.8,21.9 143.4,21.5 138.4,21.5 137.2,21.5 136.7,21.5 136.2,22 136.2,32 136.5,32.3
V5 on Top Side "Bottom Layer-No Net" (solid, remove dead copper, pour order 69): 122.9,22.5 123.6,22.5 124.2,23.1 125.5,24.4 125.5,26.4 125.5,26.8 125.3,27 124.1,27 122.4,27 122.2,26.8 122.2,25.4 122.2,24.9 122.6,24.5 122.6,23.2 122.6,22.7 122.8,22.5
GPS-PWR on Top Side "Bottom Layer-No Net" (solid, remove dead copper, pour order 71): 123.1,21.3 127.6,21.3 127.7,21.3 127.9,21.1 127.9,19.6 127.9,19.5 127.8,19.4 127.7,19.3 127.4,19.3 125.9,19.3 125.5,18.9 125.5,16.5 124.7,16.5 124.7,18.3 124.7,19 124.4,19.3 123.3,19.3 122.6,19.3 122.4,19.5 122.4,20.7 122.4,21.1 122.6,21.3
V5 on Top Side "Bottom Layer-No Net" (solid, remove dead copper, pour order 52): 3.9,38.8 8.8,38.8 9.1,39.1 9.1,41 9.1,42.6 8.8,42.9 4.3,42.9 2.6,42.9 2.3,42.6 2.3,39.1 2.6,38.8
GND on Ground Plane (split plane): 155.49,0.51 0.51,0.51 0.51,134.49 155.49,134.49
PWR-IN on Power Plane (split plane): 155.49,58.556 143.256,58.556 143.256,72.744 150.5,72.744 150.566,72.753 150.628,72.778 150.681,72.819 150.722,72.872 150.747,72.934 150.756,73 150.756,88 150.747,88.066 150.722,88.128 150.681,88.181 150.628,88.222 150.566,88.247 150.5,88.256 136.756,88.256 136.756,134.49 155.49,134.49
V3.3-MCU on Power Plane (split plane): 125.544,105.256 105,105.256 104.934,105.247 104.872,105.222 104.819,105.181 104.778,105.128 104.753,105.066 104.744,105 104.744,92 104.753,91.934 104.778,91.872 104.819,91.819 104.872,91.778 104.934,91.753 105,91.744 118.244,91.744 118.244,85.756 101.756,85.756 101.756,94.5 101.747,94.566 101.722,94.628 101.681,94.681 101.628,94.722 101.566,94.747 101.5,94.756 92.756,94.756 92.756,113.344 125.544,113.344
V12 on Power Plane (split plane): 155.49,24.756 148.256,24.756 148.256,47.5 148.247,47.566 148.222,47.628 148.181,47.681 148.128,47.722 148.066,47.747 148,47.756 125.556,47.756 125.556,51.5 125.556,58.044 155.49,58.044
no net on Power Plane (split plane): 150.244,73.256 143,73.256 142.934,73.247 142.872,73.222 142.819,73.181 142.778,73.128 142.753,73.066 142.744,73 142.744,58.556 136.756,58.556 136.756,87.744 150.244,87.744
V12-CAM on Power Plane (split plane): 136.244,88 136.244,58.556 125.556,58.556 125.556,64.5 125.547,64.566 125.522,64.628 125.481,64.681 125.428,64.722 125.366,64.747 125.3,64.756 123.256,64.756 123.256,72.244 130.5,72.244 130.566,72.253 130.628,72.278 130.681,72.319 130.722,72.372 130.747,72.434 130.756,72.5 130.756,126.5 130.747,126.566 130.722,126.628 130.681,126.681 130.628,126.722 130.566,126.747 130.5,126.756 75.256,126.756 75.256,134.49 136.244,134.49
CELLULAR-PWR on Power Plane (split plane): 112.544,46.756 103.5,46.756 103.434,46.747 103.372,46.722 103.319,46.681 103.278,46.628 103.253,46.566 103.244,46.5 103.244,23.756 95.256,23.756 95.256,46.5 95.247,46.566 95.222,46.628 95.181,46.681 95.128,46.722 95.066,46.747 95,46.756 87.256,46.756 87.256,80.244 112.544,80.244
V3.3 on Power Plane (split plane): 74.744,126.5 74.753,126.434 74.778,126.372 74.819,126.319 74.872,126.278 74.934,126.253 75,126.244 130.244,126.244 130.244,72.756 123,72.756 122.934,72.747 122.872,72.722 122.819,72.681 122.778,72.628 122.753,72.566 122.744,72.5 122.744,64.5 122.753,64.434 122.778,64.372 122.819,64.319 122.872,64.278 122.934,64.253 123,64.244 125.044,64.244 125.044,58.3 125.044,51.5 125.044,47.5 125.053,47.434 125.078,47.372 125.119,47.319 125.172,47.278 125.234,47.253 125.3,47.244 147.744,47.244 147.744,24.5 147.753,24.434 147.778,24.372 147.819,24.319 147.872,24.278 147.934,24.253 148,24.244 155.49,24.244 155.49,0.51 142.256,0.51 142.256,32.5 142.247,32.566 142.222,32.628 142.181,32.681 142.128,32.722 142.066,32.747 142,32.756 118,32.756 117.934,32.747 117.872,32.722 117.819,32.681 117.778,32.628 117.753,32.566 117.744,32.5 117.744,10.227 87,10.227 86.934,10.218 86.872,10.192 86.819,10.152 86.778,10.099 86.753,10.037 86.744,9.971 86.744,5.756 19.156,5.756 19.156,15.4 19.147,15.466 19.122,15.528 19.081,15.581 19.028,15.622 18.966,15.647 18.9,15.656 9.156,15.656 9.156,29.744 17,29.744 17.066,29.753 17.128,29.778 17.181,29.819 17.222,29.872 17.247,29.934 17.256,30 17.256,50 17.247,50.066 17.222,50.128 17.181,50.181 17.128,50.222 17.066,50.247 17,50.256 6.256,50.256 6.256,103.744 22.5,103.744 22.566,103.753 22.628,103.778 22.681,103.819 22.722,103.872 22.747,103.934 22.756,104 22.756,111.744 45,111.744 45.066,111.753 45.128,111.778 45.181,111.819 45.222,111.872 45.247,111.934 45.256,112 45.256,115.5 45.256,121.5 45.247,121.566 45.222,121.628 45.181,121.681 45.128,121.722 45.066,121.747 45,121.756 0.51,121.756 0.51,134.49 74.744,134.49
V5 on Power Plane (split plane): 44.744,115.5 44.744,112.256 22.5,112.256 22.434,112.247 22.372,112.222 22.319,112.181 22.278,112.128 22.253,112.066 22.244,112 22.244,104.256 6,104.256 5.934,104.247 5.872,104.222 5.819,104.181 5.778,104.128 5.753,104.066 5.744,104 5.744,50 5.753,49.934 5.778,49.872 5.819,49.819 5.872,49.778 5.934,49.753 6,49.744 16.744,49.744 16.744,30.256 8.9,30.256 8.834,30.247 8.772,30.222 8.719,30.181 8.678,30.128 8.653,30.066 8.644,30 8.644,15.4 8.653,15.334 8.678,15.272 8.719,15.219 8.772,15.178 8.834,15.153 8.9,15.144 18.644,15.144 18.644,5.5 18.653,5.434 18.678,5.372 18.719,5.319 18.772,5.278 18.834,5.253 18.9,5.244 87,5.244 87.066,5.253 87.128,5.278 87.181,5.319 87.222,5.372 87.247,5.434 87.256,5.5 87.256,9.714 117.971,9.714 118.037,9.723 118.099,9.749 118.152,9.789 118.164,9.806 118.181,9.819 118.222,9.872 118.247,9.934 118.256,10 118.256,32.244 141.744,32.244 141.744,0.51 0.51,0.51 0.51,121.244 44.744,121.244

## Keep-outs
Top Side:
  lines w0.1: 136.4,6 136.4,8.2 137.2,9 145.3,9 145.3,7.2 137.9,7.2 137.6,6.9 137.6,6
Bottom Side:
  lines w0.1: 127.5,80.5 128.8,79.2 132.3,79.2 132.7,78.8 132.7,61.6 135.1,59.2 135.3,59 136.3,59 136.6,59 136.6,58.8 138.7,58.8 ; 128.7,80.6 129.3,80 ; 131.5,80 132.6,80 133.5,79.1 ; 133.6,62 135.6,60 136.7,60
Keep-Out Layer:
  lines w0.254: 0,0 0,135 156,135 156,0 0,0 ; 23.6,13.9 62.6,13.9 62.6,75.9 23.6,75.9 23.6,13.9

## Other copper
Power Plane (plane layer: these items are gaps in the copper):
  lines w0.254: 117.971,9.971 118,10
  lines w0.508: 0,121.5 45,121.5 45,115.5 45,112 22.5,112 22.5,104 6,104 6,50 17,50 17,30 8.9,30 8.9,15.4 18.9,15.4 18.9,5.5 83.6,5.5 87,5.5 87,9.971 117.971,9.971 ; 75,135 75,126.5 120.1,126.5 125.5,126.5 130.5,126.5 130.5,72.5 123,72.5 123,64.5 125.3,64.5 125.3,58.3 ; 118,10 118,32.5 142,32.5 142,0 ; 136.5,58.3 136.5,88 ; 136.5,135 136.5,88 ; 156,24.5 148,24.5 148,47.5 125.3,47.5 125.3,51.5 125.3,58.3 ; 156,58.3 143,58.3 ; 125.3,58.3 143,58.3 ; 136.5,88 150.5,88 150.5,73 143,73 143,58.3 ; 87,46.5 87,80.5 104.3,80.5 112.8,80.5 112.8,46.5 103.5,46.5 103.5,23.5 95,23.5 95,46.5 87,46.5 ; 92.5,94.5 101.5,94.5 101.5,85.5 118.5,85.5 118.5,92 105,92 105,105 125.8,105 125.8,113.6 102.3,113.6 92.5,113.6 92.5,94.5

## Silkscreen, mask and mechanical layers (free items; w line width, h text height)
Top Overlay:
  text "M1-3" at 82.1,47.1 h0.8
  text "M1-1" at 11.2,29.4 h0.8
  text "PJ1308-001-A2" at 27.8,9.2 h1.52
  text "M1-2" at 82.1,8.55 h0.8
  text "2014.1.9" at 27.8,6.3 h1.52

## Text inside footprints (layer, text, board x,y; h text height)
J5: Top Overlay "1" at 114.7,60.6 h1 r180; Top Overlay "2" at 114.5,48 h1 r180; Top Overlay "52" at 91.8,48 h1 r180; Top Overlay "51" at 91.9,60.6 h1 r180
M1: Top Overlay "B2" at 78.9,45.2 h0.8 r90; Top Overlay "B1" at 80.8,45.2 h0.8 r90; Top Overlay "C2" at 78.8,6.8 h0.8 r90; Top Overlay "C1" at 80.7,6.8 h0.8 r90; Top Overlay "A2" at 13.7,91.3 h0.8 r90; Top Overlay "A1" at 11.6,91.3 h0.8 r90